# Altium PCB ICD_ADAPTER.PcbDoc
Units mil, origin at the board's own origin, x right, y up, seen from the top; angles counter-clockwise.
Board outline 1300 x 1200 mil, 2 copper layers (Top Layer, Bottom Layer); 2 components, 6 nets, 20 pads, 0 vias.
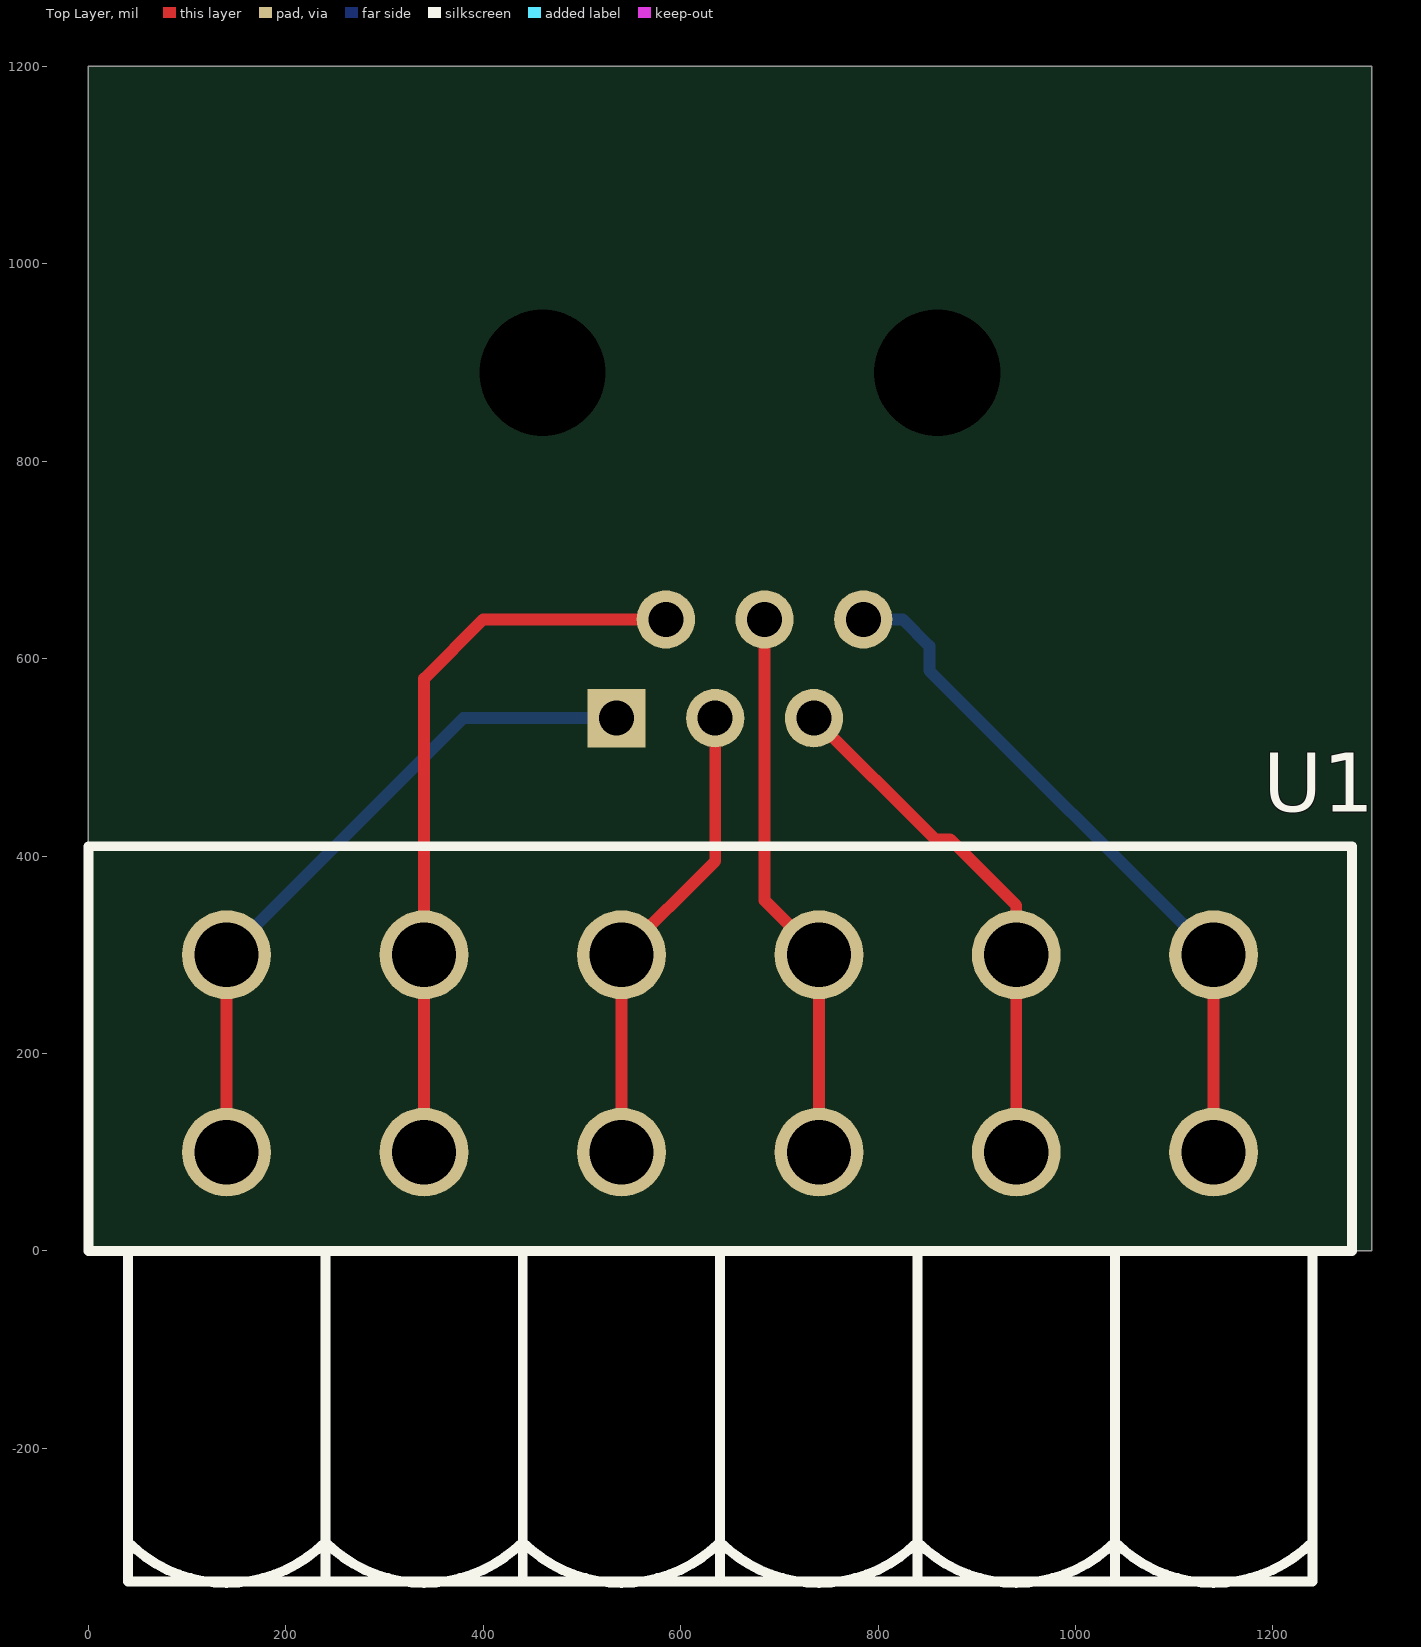
[diagram p0: Top Layer view]
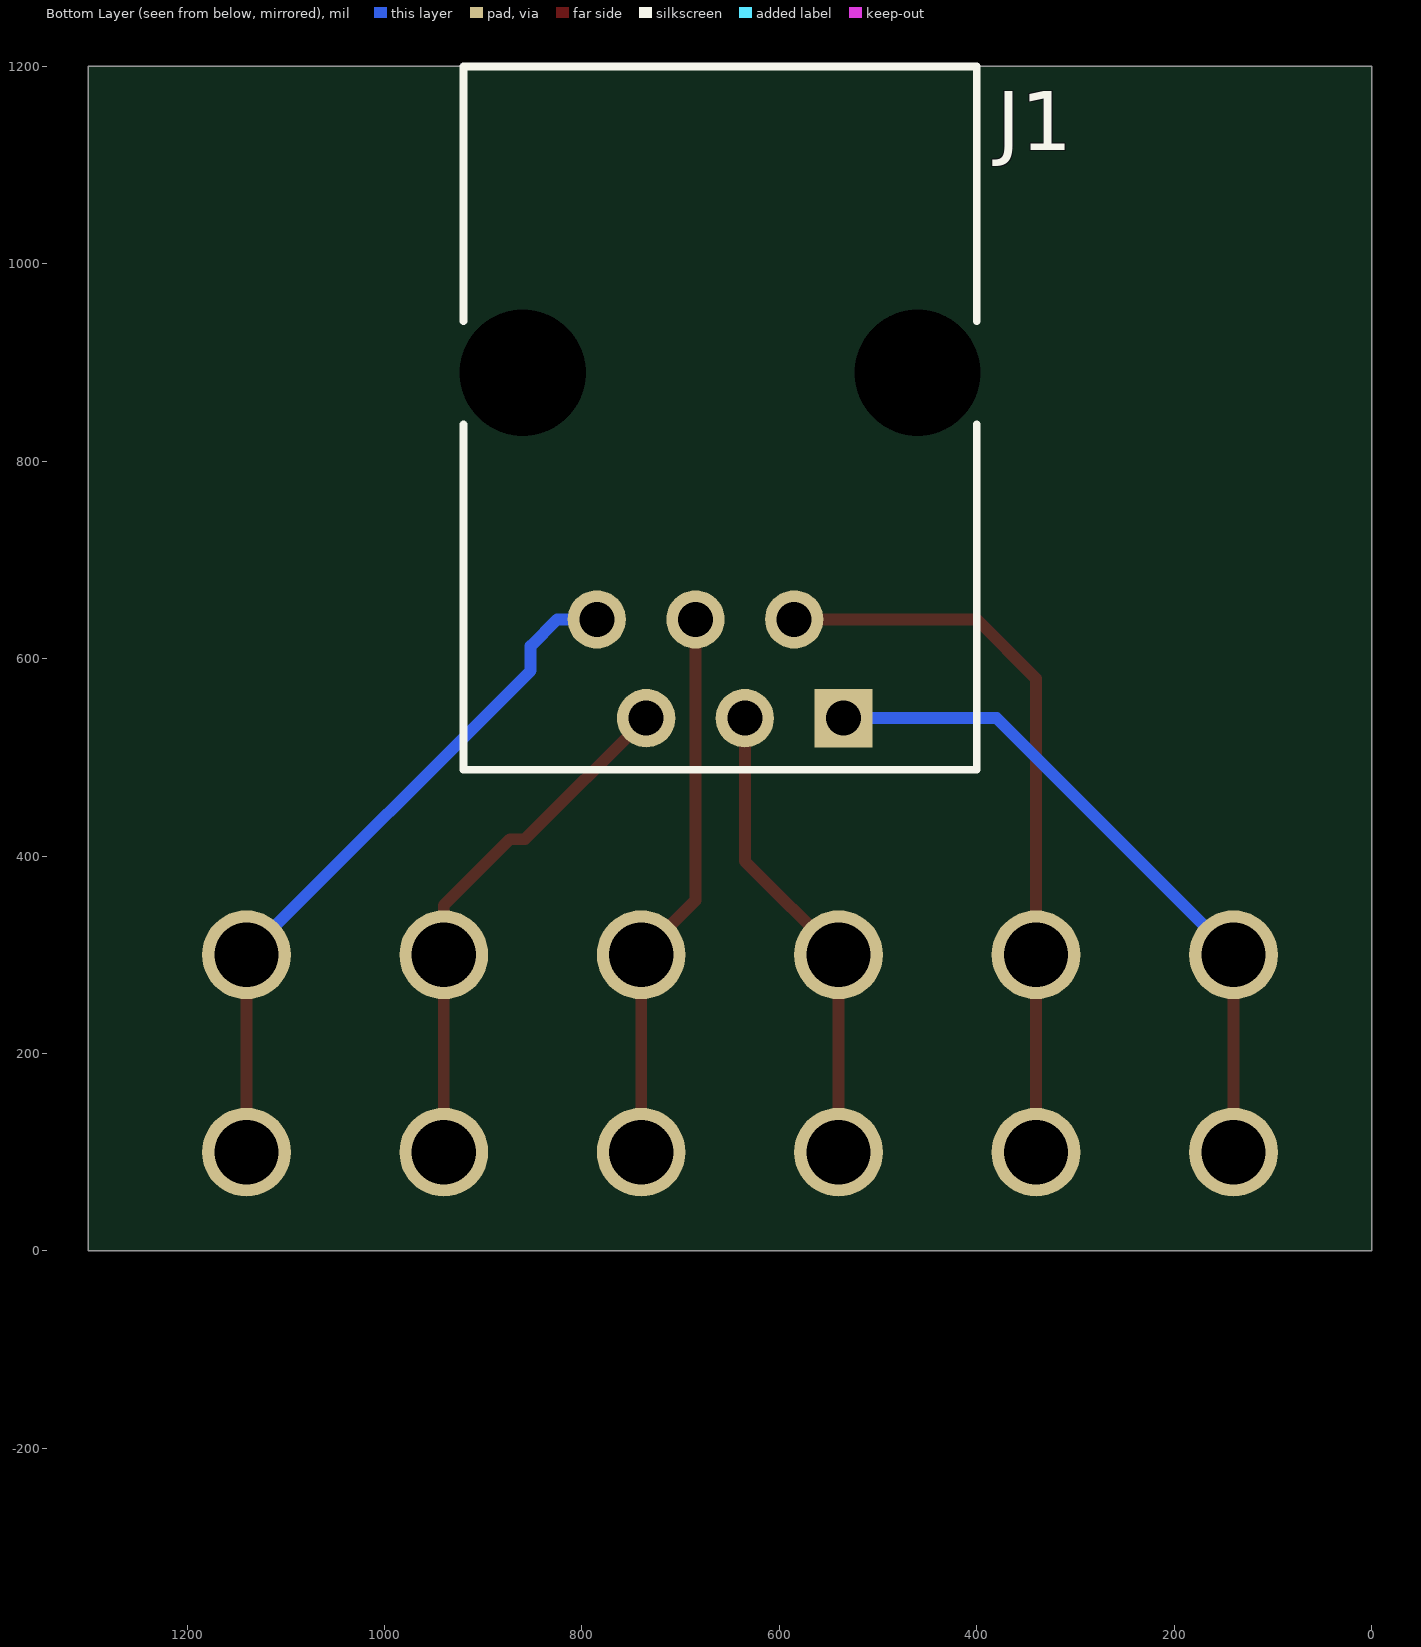
[diagram p1: Bottom Layer view, seen from below]

## Layer stack, top to bottom
Top Layer: signal copper 1.4
Dielectric: dielectric 12.6, FR-4, Dk 4.8
Bottom Layer: signal copper 1.4

## Board outline
0,0 0,1200 1300,1200 1300,0 0,0

## Design rules (kind name [scope] priority, off if disabled: settings)
Clearance [All] p1: gap=14
ComponentClearance [All] p1: gap=10 collisioncheckmode=3 verticalgap=10
PolygonConnect [All] p1: connectstyle=Relief reliefconductorwidth=10 reliefentries=4 polygonreliefangle="90 Angle"
RoutingVias [All] p1: holewidth=28 width=50 viastyle="Through Hole" minholewidth=28 minwidth=50 maxholewidth=28 maxwidth=50
SolderMaskExpansion [All] p1: expansion=4
TestPointUsage [All] p1: valid=0 allowmultiple=FALSE
Testpoint [All] p1: side=15 testpointundercomponent=TRUE minsize=40 maxsize=100 preferedsize=60 minholesize=0 maxholesize=40 preferedholesize=32 testpointgrid=1 style=1023 order=0123456789
Width [All] p1: maxlimit=12 minlimit=10 preferedwidth=10 toplayer_minwidth=12 toplayer_prefwidth=12 bottomlayer_minwidth=12 bottomlayer_prefwidth=12 minimp=50.000000 maximp=50.000000 favimp=50.000000
18 further rules are at their usual default settings.

## Components (designator, comment, footprint, x,y, rotation, side; value= is the part's Value field where it differs from the comment)
J1 "CONN MOD JACK 6-6 RT/A PCB 50AU" 43202-6101 660,1200 r0 bottom
U1 "1786446" 1786446 140,100 r0 top

## Footprints (in the part's own frame and the unit in brackets; to place one, negate y for a bottom-side part, rotate by r counter-clockwise, add the part's x,y. Pads: shape width x height; smd on the part's side, far side on the other; paste and mask are expansions set on the pad)
43202-6101 [mm] "Connector; PCB Jack, Thru-Hole; 1-Port, 6 Positions, 6 Loaded; Unshielded without Lightpipes; Right Angle"
  rect 1.5x1.5 hole 0.9: 1(-3.175,16.77)
  round 1.5 hole 0.9: 2(-1.905,14.23) 3(-0.635,16.77) 4(0.635,14.23) 5(1.905,16.77) 6(3.175,14.23)
  round 2.95 hole 3.25 unplated: MH1(-5.08,7.88) MH2(5.08,7.88)
  silkscreen extent -6.61,0 6.6,18.1
1786446 [mil] "TERM BLK HEADER INV 6POS 5.08MM"
  round 90 hole 65: 1(0,0) 1(0,200) 2(200,0) 2(200,200) 3(400,0) 3(400,200) 4(600,0) 4(600,200) 5(800,0) 5(800,200) 6(1000,0) 6(1000,200)
  silkscreen extent -140,-436 1140,310, body extent -139,-437 1139,311, height 405

## Part data
J1: library part "Microchip ICD2"

## Nets (pads, with @x,y where several pads share a name; then routed paths per layer and width w, separated by ;. In a path a pad name is that pad's centre, name@x,y a point inside that pad or via, vN(x,y) a via of type N, cw(c..) or ccw(c..) an arc to the next point about the centre after c; other vN are vias at no path point)
NetJ1_1: J1.1 U1.1 | length 694.3
  Top Layer w12: U1.1@140,100 U1.1@140,300
  Bottom Layer w12: U1.1@140,300 379.76,539.76 J1.1
NetJ1_2: J1.2 U1.2 | length 749.6
  Top Layer w12: U1.2@340,100 340,300 340,579.76 400,639.76 J1.2
NetJ1_3: J1.3 U1.3 | length 479.1
  Top Layer w12: U1.3@540,100 540,300 635,395 J1.3
NetJ1_4: J1.4 U1.4 | length 562.5
  Top Layer w12: J1.4 685,355 740,300 U1.4@740,100
NetJ1_5: J1.5 U1.5 | length 533.6
  Top Layer w12: J1.5 857.76,417 873,417 940,350 940,300 U1.5@940,100
NetJ1_6: J1.6 U1.6 | length 710.2
  Top Layer w12: U1.6@1140,100 U1.6@1140,300
  Bottom Layer w12: J1.6 825,639.76 852,612.76 852,588 U1.6@1140,300
pads on no net: J1.MH1 J1.MH2

## Silkscreen, mask and mechanical layers (free items; w line width, h text height)
Mechanical 1:
  the board outline again, w10